# Altium PCB Optical Compressor V2.PcbDoc (part 1 of 2)
Units mm, origin at the board's own origin, x right, y up, seen from the top; angles counter-clockwise.
Board outline 47 x 95 mm, 4 copper layers (Top Copper, Ground Top, Ground Bottom, Bottom Copper), stack 1.706 mm thick; 141 components, 86 nets, 384 pads, 31 vias.
Unrouted connection lines stored in the file: 163.
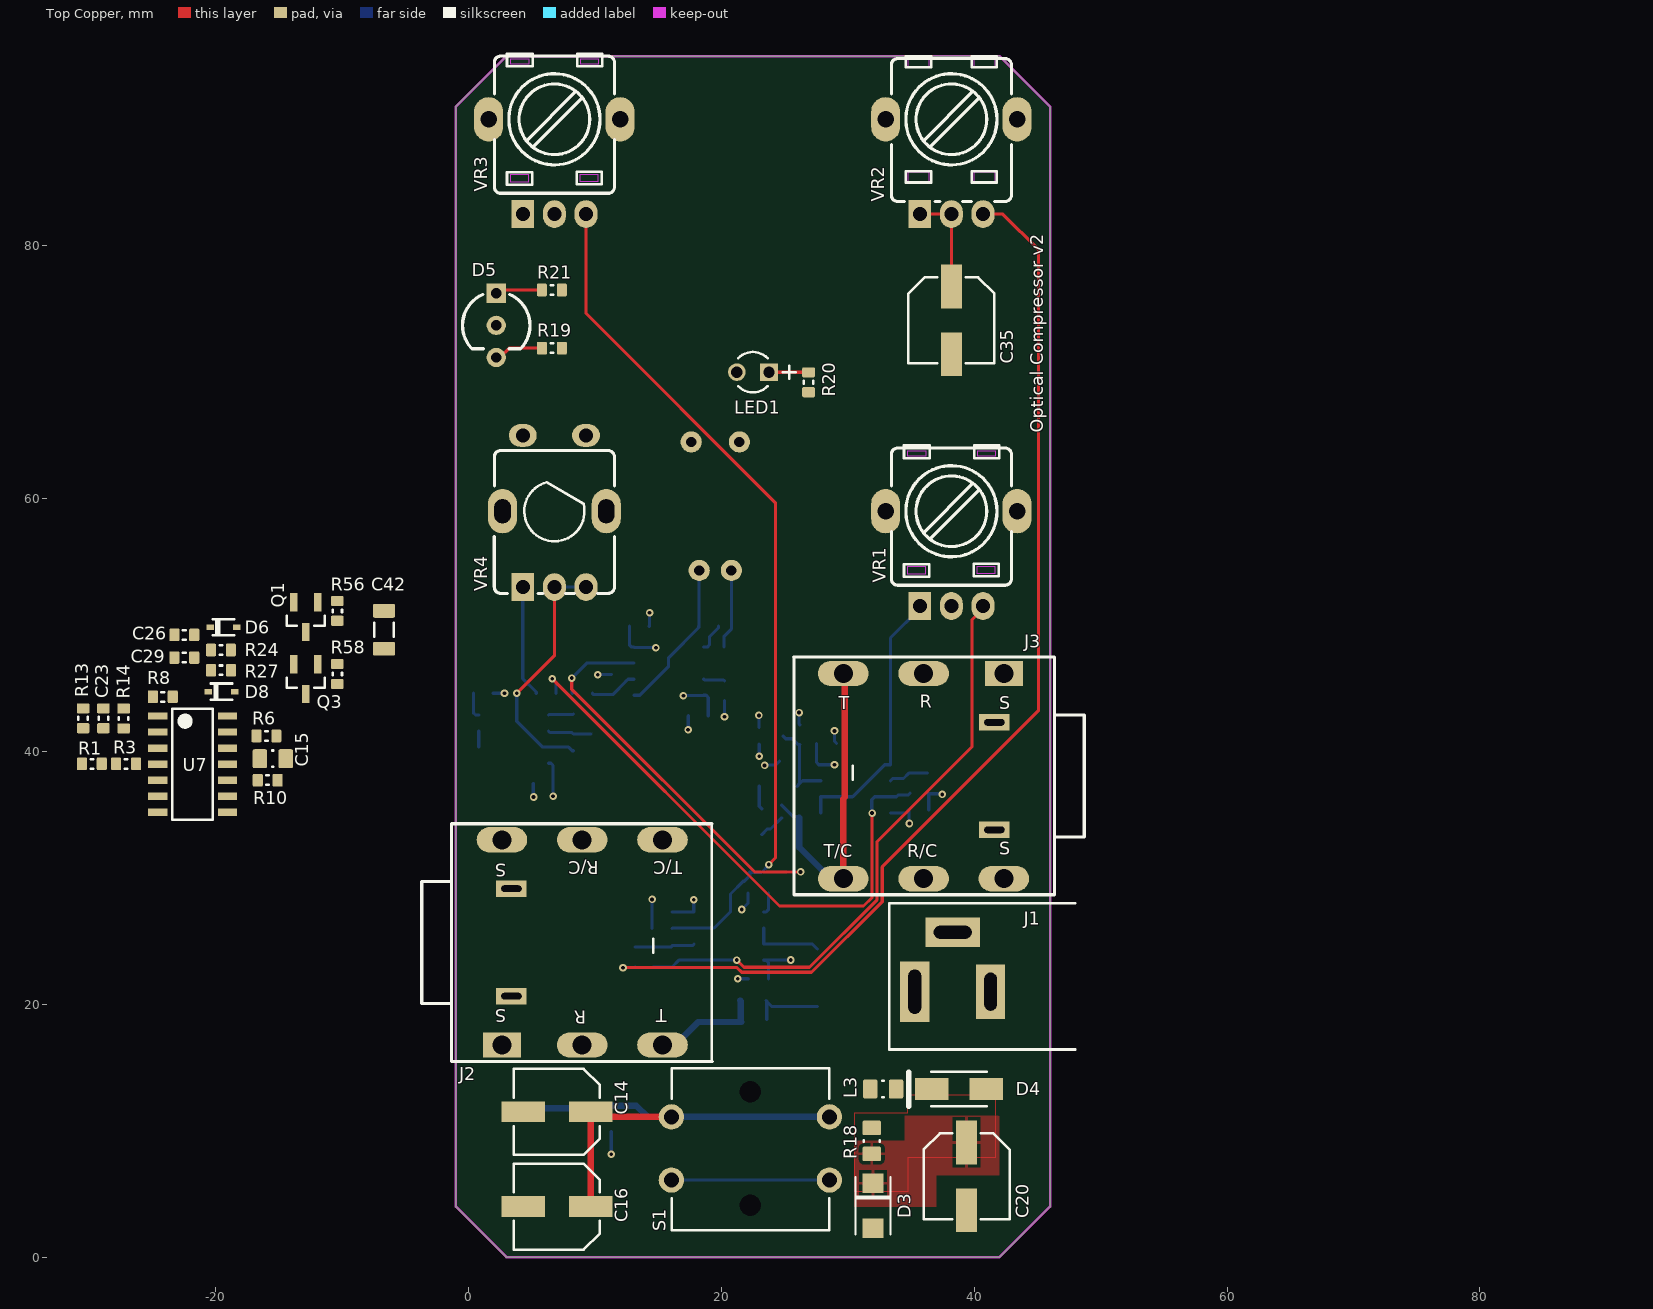
[diagram p0: Top Copper view]
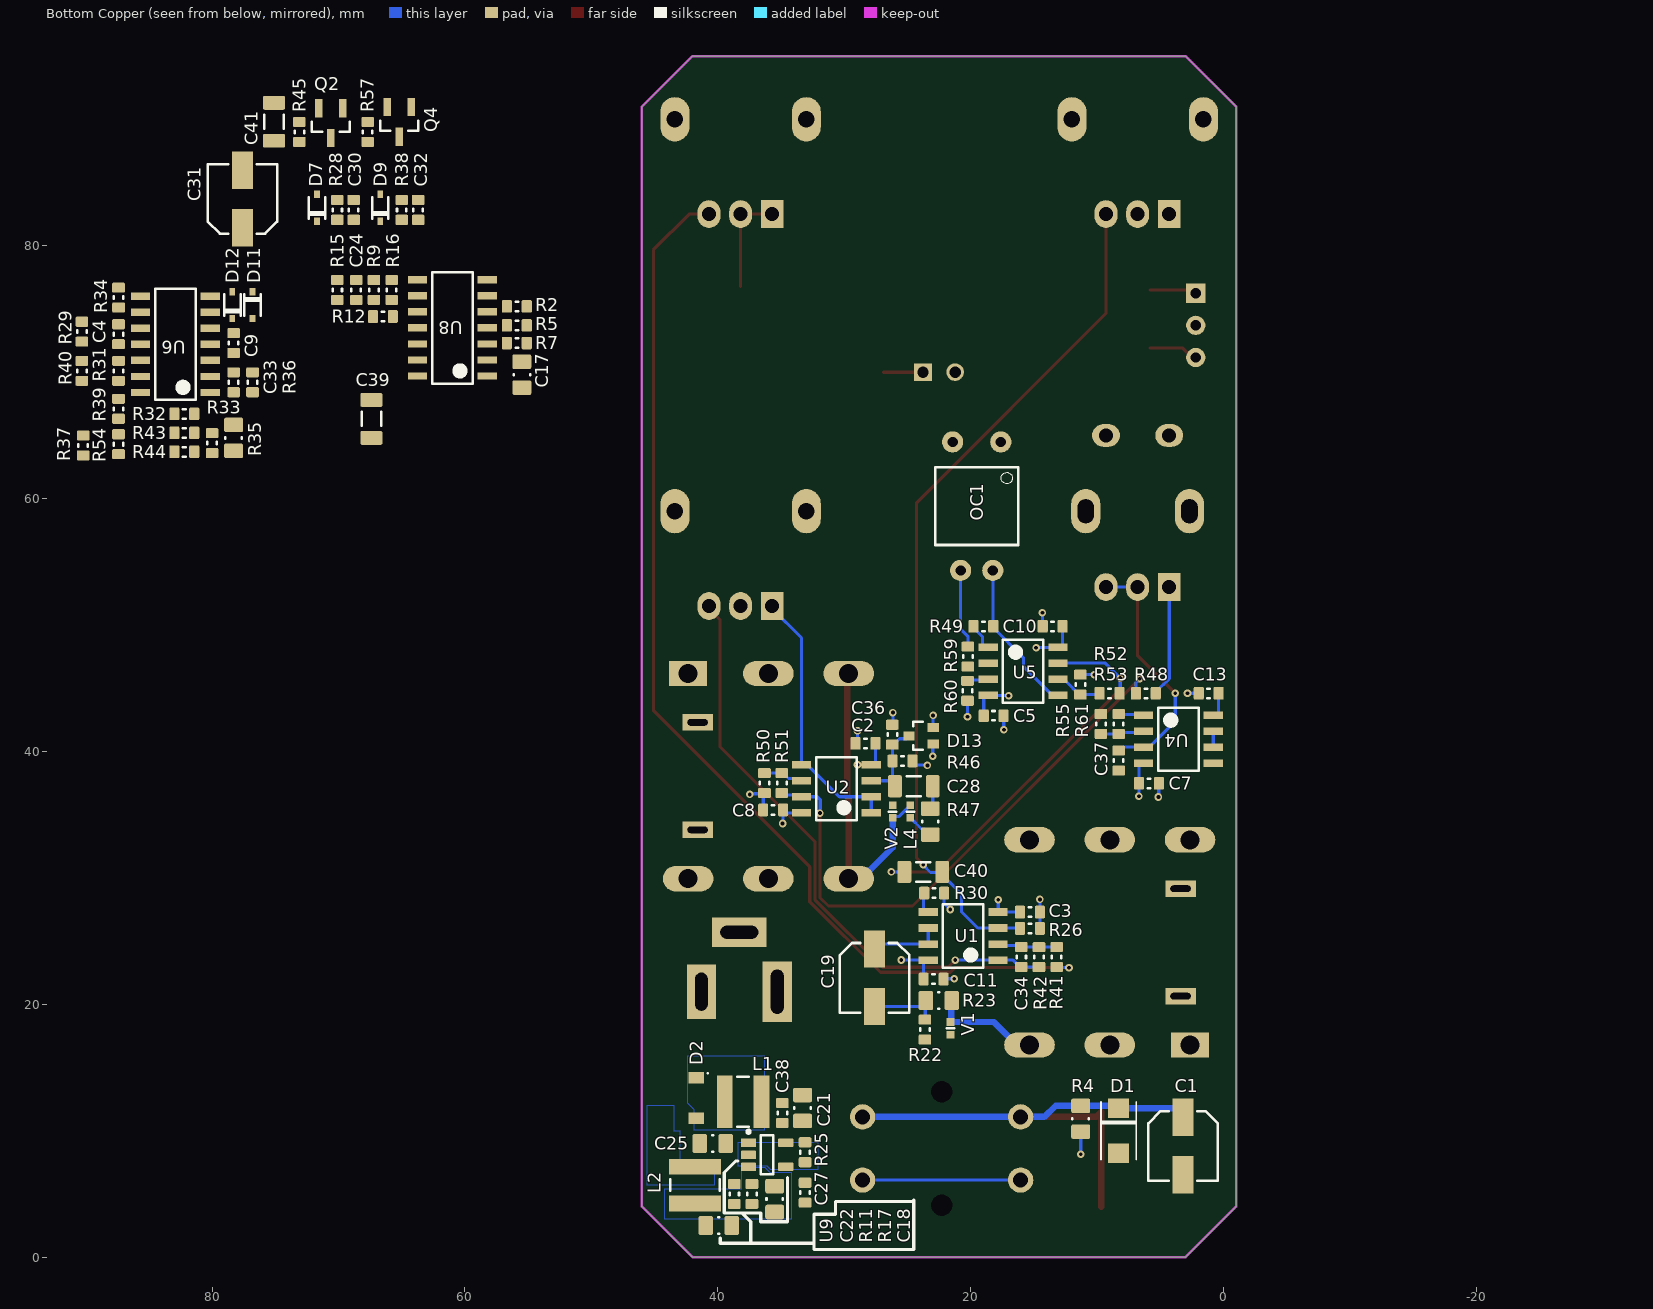
[diagram p1: Bottom Copper view, seen from below]
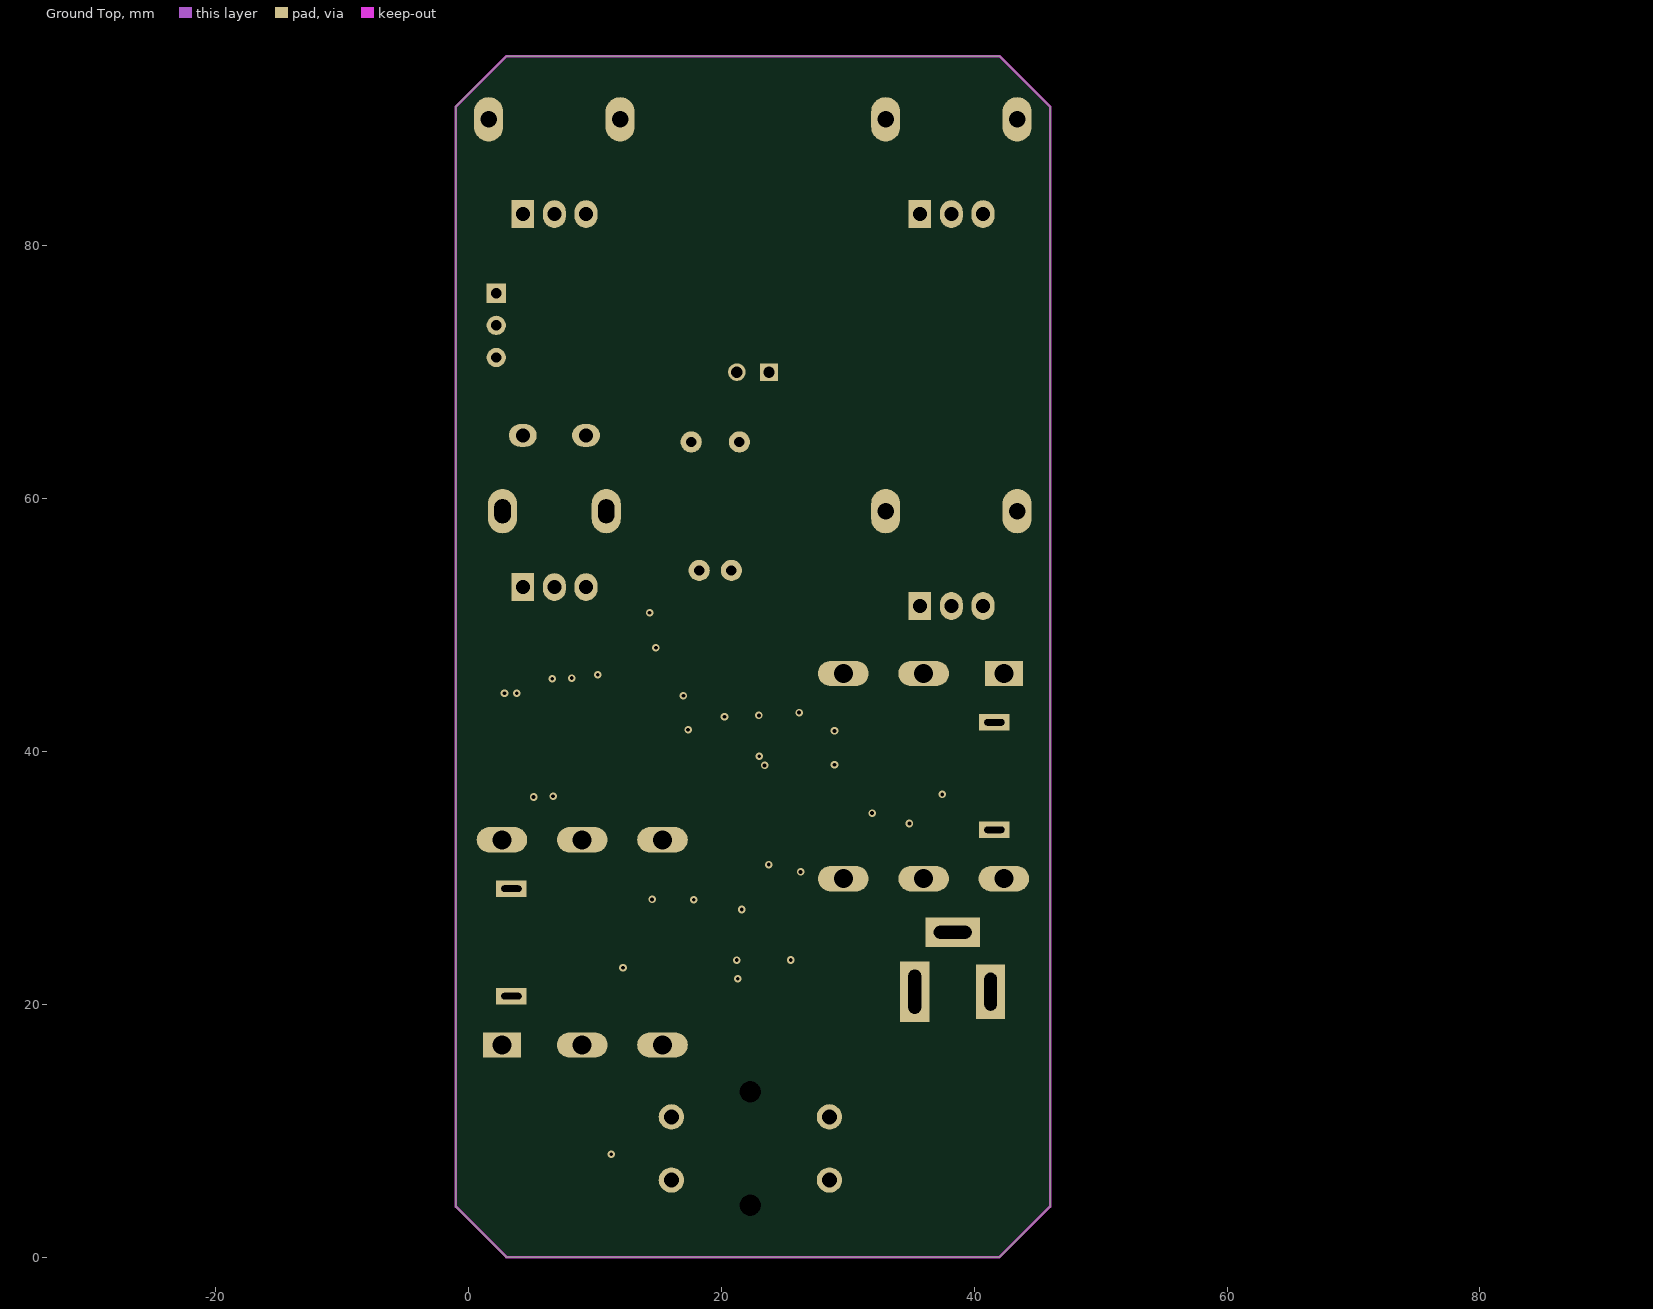
[diagram p2: Ground Top]
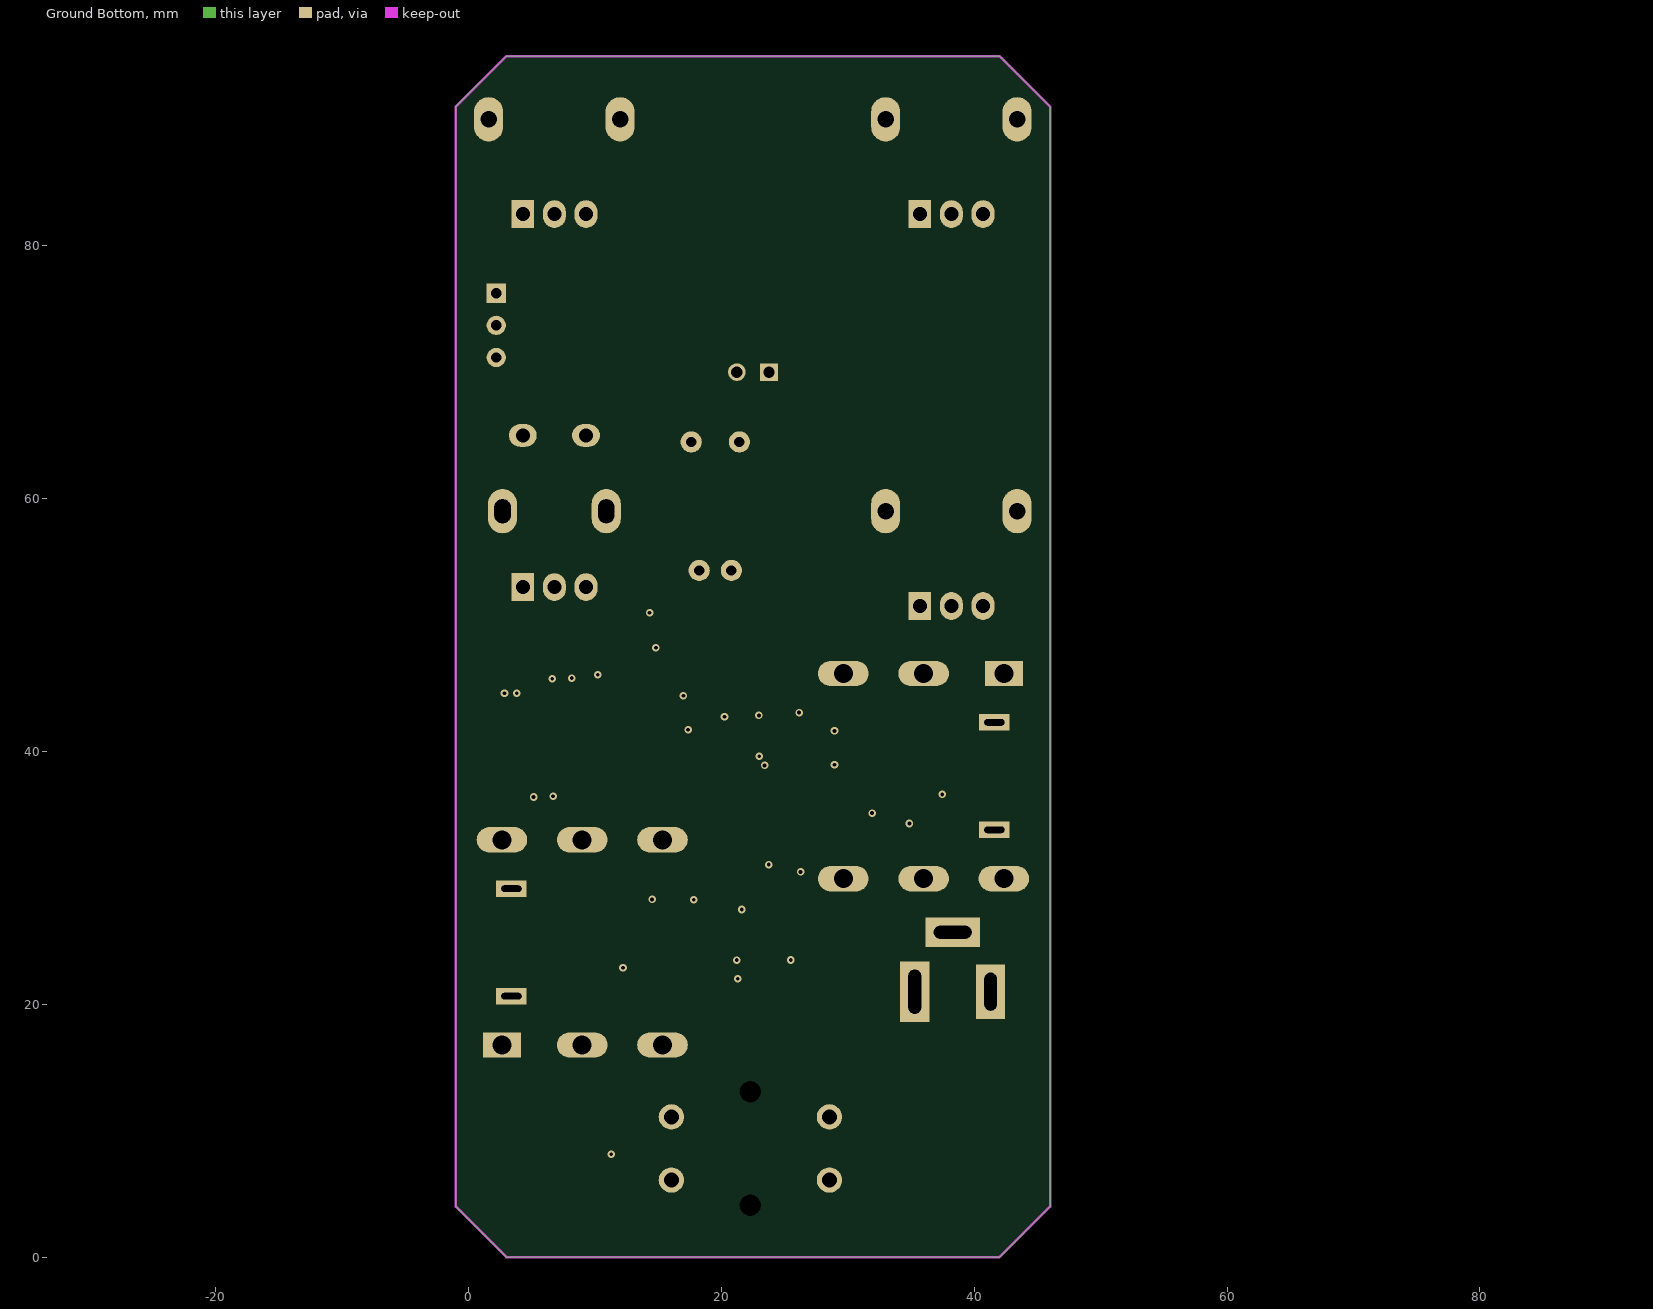
[diagram p3: Ground Bottom]

## Layer stack, top to bottom
Top Solder: solder mask 0.0203, JLC-001, Dk 3.8
Top Copper: signal copper 0.035
Dielectric 4: prepreg 0.2, JLC7628, Dk 4.6
Ground Top: signal copper 0.018
Dielectric 1: core 1.2, Core-009, Dk 3.9
Ground Bottom: signal copper 0.018
Dielectric 5: prepreg 0.2, JLC7628, Dk 4.6
Bottom Copper: signal copper 0.035
Bottom Solder: solder mask 0.0203, JLC-001, Dk 3.8

## Board outline
-1,91 -1,4 3,0 42,0 46,4 46,91 42,95 3,95

## Design rules (kind name [scope] priority, off if disabled: settings)
Clearance "Clearance Selective" [OnLayer('Multi-Layer') And IsPad And PadIsPlated vs OnLayer('Bottom Copper') And IsPad] p1: gap=0 ignorepadtopadclearanceinfootprint=FALSE except(3: SMDPad-THPad)
Clearance [All] p2: gap=0.15 ignorepadtopadclearanceinfootprint=TRUE
PlaneConnect [All] p1: pad.planeconnectstyle=Relief pad.reliefexpansion=0.5 pad.reliefentries=4 pad.reliefconductorwidth=0.25 pad.reliefairgap=0.25 via.planeconnectstyle=Direct via.reliefexpansion=0.5 via.reliefentries=4 via.reliefconductorwidth=0.25 via.reliefairgap=0.25
PolygonConnect PolygonConnect_LM2611 [All vs IsNamedPolygon('+9V_L01_P016') Or IsNamedPolygon('-9V_L04_P019') Or IsNamedPolygon('NONET_L04_P017') Or IsNamedPolygon('NONET_L04_P018') Or IsNamedPolygon('NONET_L04_P015') Or IsNamedPolygon('NONET_L01_P009') Or IsNamedPolygon('NONET_L04_P010')] p1: thpad.connectstyle=Relief thpad.reliefconductorwidth=0.254 thpad.reliefentries=4 thpad.polygonreliefangle="90 Angle" thpad.airgapwidth=0.254 smdpad.connectstyle=Direct smdpad.reliefconductorwidth=0.254 smdpad.reliefentries=4 smdpad.polygonreliefangle="90 Angle" smdpad.airgapwidth=0.254 via.connectstyle=Direct via.reliefconductorwidth=0.254 via.reliefentries=4 via.polygonreliefangle="90 Angle" via.airgapwidth=0.254
PolygonConnect [All] p2: thpad.connectstyle=Relief thpad.reliefconductorwidth=0.254 thpad.reliefentries=4 thpad.polygonreliefangle="90 Angle" thpad.airgapwidth=0.254 smdpad.connectstyle=Relief smdpad.reliefconductorwidth=0.254 smdpad.reliefentries=4 smdpad.polygonreliefangle="90 Angle" smdpad.airgapwidth=0.254 via.connectstyle=Direct via.reliefconductorwidth=0.254 via.reliefentries=4 via.polygonreliefangle="90 Angle" via.airgapwidth=0.254
RoutingVias [All] p1: holewidth=0.3 width=0.6 viastyle="Through Hole" minholewidth=0.3 minwidth=0.6 maxholewidth=0.3 maxwidth=0.6
SolderMaskExpansion [All] p1: expansion=0.102 istentingtop=FALSE
Width [All] p1: maxlimit=1 minlimit=0.25 preferedwidth=0.25
29 further rules are at their usual default settings.

## Components (designator, comment, footprint, x,y, rotation, side; value= is the part's Value field where it differs from the comment)
C1 "Cap pol 10µF 35V" "E-CAP, SMT, diameter 5mm, height 5.4mm" 3.2,8.8 r270 bottom
C2 "Cap 100nF 0603 X7R" 0603-CAP 28.325,40.638 r0 bottom
C3 "Cap 100nF 0603 X7R" 0603-CAP 15.313,27.3 r180 bottom
C4 "Cap 100nF 0603 X7R" 0603-CAP 87.4,73 r90 bottom
C5 "Cap 100nF 0603 X7R" 0603-CAP 18.183,42.825 r180 bottom
C7 "Cap 100nF 0603 X7R" 0603-CAP 5.9,37.475 r180 bottom
C8 "Cap 100nF 0603 X7R" 0603-CAP 35.625,35.375 r0 bottom
C9 "Cap 100nF 0603 X7R" 0603-CAP 78.3,72.3 r270 bottom
C10 "Cap 100nF 0603 X7R" 0603-CAP 13.517,49.9 r180 bottom
C11 "Cap 100nF 0603 X7R" 0603-CAP 22.933,22 r0 bottom
C13 "Cap 100nF 0603 X7R" 0603-CAP 1.175,44.6 r180 bottom
C14 "Cap pol 47µF 16V" "E-CAP, SMT, diameter 6.3mm, height 5.4mm" 7,11.5 r180 top
C15 "Cap 0805 2.2uF" 0805-CAP -15.475,39.425 r0 top value="2.2 uF"
C16 "Cap pol 47µF 16V" "E-CAP, SMT, diameter 6.3mm, height 5.4mm" 7,4 r180 top
C17 "Cap 0805 2.2uF" 0805-CAP 55.5,69.8 r270 bottom value="2.2 uF"
C18 "Cap 0805 22uF" 0805-CAP 39.925,2.5 r180 bottom value=22uF
C19 "Cap pol 10µF 35V" "E-CAP, SMT, diameter 5mm, height 5.4mm" 27.6,22.1 r270 bottom
C20 "Cap pol 220µF 16V" "E-CAP, SMT, diameter 6.3mm, height 7.7mm" 39.4,6.4 r270 top
C21 "Cap 0805 22uF" 0805-CAP 33.3,11.8 r270 bottom value=22uF
C22 "Cap 0603 330pF" 0603-CAP 38.7,5 r90 bottom value=330pF
C23 "Cap 100nF 0603 X7R" 0603-CAP -28.875,42.625 r90 top
C24 "Cap 100nF 0603 X7R" 0603-CAP 68.6,76.5 r270 bottom
C25 "Cap 1µF 0805 X7R" 0805-CAP 40.4,9 r0 bottom
C26 "Cap 100nF 0603 X7R" 0603-CAP -22.475,49.225 r180 top
C27 "Cap 100nF 0603 X7R" 0603-CAP 33.1,5.1 r270 bottom
C28 "Cap 100nF 1206 C0G" 1206-CAP 24.5,37.25 r0 bottom
C29 "Cap 100nF 0603 X7R" 0603-CAP -22.475,47.425 r0 top
C30 "Cap 100nF 0603 X7R" 0603-CAP 68.8,82.837 r270 bottom
C31 "Cap pol 10µF 35V" "E-CAP, SMT, diameter 5mm, height 5.4mm" 77.6,83.7 r90 bottom
C32 "Cap 100nF 0603 X7R" 0603-CAP 63.7,82.837 r90 bottom
C33 "Cap 10nF 0603 C0G" 0603-CAP 78.3,69.2 r270 bottom
C34 "Cap 0603 100pF" 0603-CAP 16,23.737 r270 bottom value=100pF
C35 "Cap pol 220µF 16V" "E-CAP, SMT, diameter 6.3mm, height 7.7mm" 38.2,74.1 r270 top
C36 "Cap 100pF 0603 C0G" 0603-CAP 26.2,41.325 r90 bottom
C37 "Cap 3.3nF 0603 C0G" 0603-CAP 8.3,39.275 r270 bottom
C38 "Cap 100nF 0603 X7R" 0603-CAP 34.9,11.4 r90 bottom
C39 "Cap 100nF 1206 C0G" 1206-CAP 67.4,66.3 r90 bottom
C40 "Cap 100nF 1206 C0G" 1206-CAP 23.75,30.475 r180 bottom
C41 "Cap 100nF 1206 C0G" 1206-CAP 75.1,89.8 r270 bottom
C42 "Cap 100nF 1206 C0G" 1206-CAP -6.675,49.625 r270 top
D1 "SML4742-E3/5A" DO-214AC 8.3,8.232 r90 bottom
D2 "MBR0520-TP" SODFL370X135-2N 41.7,12.6 r270 bottom
D3 "SML4742-E3/5A" DO-214AC 32,2.3 r90 top
D4 "SS14" SS14 38.8,13.3 r180 top
D5 "3pled" "LED DUAL REDBLUE" 2.2,73.7 r270 top locked
D6 "1N4148WS-7-F" 1N4148WS-7-F -19.375,49.825 r180 top
D7 "1N4148WS-7-F" 1N4148WS-7-F 71.7,83 r270 bottom
D8 "1N4148WS-7-F" 1N4148WS-7-F -19.52,44.725 r180 top
D9 "1N4148WS-7-F" 1N4148WS-7-F 66.7,83 r270 bottom
D11 "1N4148WS-7-F" 1N4148WS-7-F 76.8,75.3 r90 bottom
D12 "1N4148WS-7-F" 1N4148WS-7-F 78.4,75.3 r270 bottom
D13 "BAT54SWT1G" ONSC-SOT-323-3-419-04_V 23.925,41.236 r0 bottom
J1 "DC Jack TH" DC_Jack 38.674,20.873 r180 top locked
J2 "Neutrik TRS Jack with metal nut" "Neutrik Jack with Cliff EMI screen" 9,24.9 r180 top locked
J3 "Neutrik TRS Jack with metal nut" "Neutrik Jack with Cliff EMI screen" 36,38.05 r0 top locked
L1 "CR32NP-100KC" INDC3340X27N 38,12.3 r0 bottom
L2 "CR32NP-100KC" INDC3340X27N 41.8,5.7 r270 bottom
L3 "Ferrite BLM21SP102SN1" 0805-IND 32.8,13.3 r180 top
L4 "MAF1005GAD352A" "0402 COMPONENT" 24.775,35.25 r270 bottom
LED1 "LED 3mm RED" KING-WP710A10QBCD_V 22.5,70 r180 top locked
OC1 "NSL-32SR2S" NSL 19.525,59.4 r90 bottom
Q1 "MMBFJ201" MMBFJ201 -12.875,50.625 r270 top
Q2 "MMBFJ201" MMBFJ201 70.6,89.7 r270 bottom
Q3 "MMBFJ201" MMBFJ201 -12.875,45.725 r270 top
Q4 "MMBFJ201" MMBFJ201 65.2,89.8 r270 bottom
R1 "Res 20k 1% 0603" 0603-RES -29.788,39.025 r0 top
R2 "Res 20k 1% 0603" 0603-RES 55.9,75.2 r0 bottom
R3 "Res 10k 1% 0603" 0603-RES -27.075,39.025 r180 top
R4 "Res 10R 5% 0805" 0805-RES 11.3,10.95 r270 bottom
R5 "Res 10k 1% 0603" 0603-RES 55.9,73.7 r180 bottom
R6 "Res 10k 1% 0603" 0603-RES -15.975,41.225 r180 top
R7 "Res 10k 1% 0603" 0603-RES 55.9,72.3 r0 bottom
R8 "Res 10k 1% 0603" 0603-RES -24.175,44.325 r180 top
R9 "Res 10k 1% 0603" 0603-RES 67.2,76.5 r270 bottom
R10 "Res 10k 1% 0603" 0603-RES -15.875,37.725 r180 top
R11 "Res 4.7k 1% 0603" 0603-RES 37.3,5 r270 bottom
R12 "Res 10k 1% 0603" 0603-RES 66.487,74.4 r180 bottom
R13 "Res 100k 1% 0603" 0603-RES -30.475,42.625 r90 top
R14 "Res 10k 1% 0603" 0603-RES -27.275,42.612 r90 top
R15 "Res 100k 1% 0603" 0603-RES 70.1,76.5 r270 bottom
R16 "Res 10k 1% 0603" 0603-RES 65.8,76.5 r270 bottom
R17 "Res 29.4k 1% 0805" 0805-RES 35.5,4.6 r90 bottom
R18 "Res 10R 5% 0805" 0805-RES 31.9,9.2 r270 top
R19 "Res 10k 1% 0603" 0603-RES 6.6,71.9 r0 top
R20 "Res 10k 1% 0603" 0603-RES 26.9,69.2 r270 top
R21 "Res 10k 1% 0603" 0603-RES 6.6,76.5 r0 top
R22 "Res 100k 1% 0603" 0603-RES 23.62,18 r270 bottom
R23 "Res 100R 1% 0805" 0805-RES 22.52,20.3 r180 bottom
R24 "Res 1M 1% 0603" 0603-RES -19.575,48.025 r0 top
R25 "Res 100k 1% 0603" 0603-RES 33.1,8.3 r270 bottom
R26 "Res 1M 1% 0603" 0603-RES 15.313,26 r180 bottom
R27 "Res 1M 1% 0603" 0603-RES -19.575,46.425 r0 top
R28 "Res 1M 1% 0603" 0603-RES 70.1,82.837 r90 bottom
R29 "Res 6.81k 1% 0603" 0603-RES 90.3,73.2 r270 bottom
R30 "Res 1M 1% 0603" 0603-RES 22.887,28.8 r180 bottom
R31 "Res 2.2k 1% 0603" 0603-RES 87.4,70.1 r90 bottom
R32 "Res 10k 1% 0603" 0603-RES 82.2,66.7 r180 bottom
R33 "Res 10k 1% 0603" 0603-RES 80,64.387 r270 bottom
R34 "Res 20k 1% 0603" 0603-RES 87.4,75.9 r270 bottom
R35 "Res 200R 1% 0805" 0805-RES 78.3,64.8 r90 bottom
R36 "Res 6.81k 1% 0603" 0603-RES 76.8,69.2 r90 bottom
R37 "Res 10k 1% 0603" 0603-RES 90.2,64.2 r90 bottom
R38 "Res 1M 1% 0603" 0603-RES 65,82.837 r90 bottom
R39 "Res 10k 1% 0603" 0603-RES 87.4,67.1 r90 bottom
R40 "Res 20k 1% 0603" 0603-RES 90.3,70.1 r90 bottom
R41 "Res 3.3k 1% 0603" 0603-RES 13.2,23.737 r90 bottom
R42 "Res 10k 1% 0603" 0603-RES 14.6,23.737 r270 bottom
R43 "Res 10k 1% 0603" 0603-RES 82.2,65.2 r0 bottom
R44 "Res 10k 1% 0603" 0603-RES 82.2,63.7 r180 bottom
R45 "Res 100k 1% 0603" 0603-RES 73.1,89 r90 bottom
R46 "Res 1M 1% 0603" 0603-RES 25.388,39.25 r180 bottom
R47 "Res 100R 1% 0805" 0805-RES 23.2,34.45 r90 bottom
R48 "Res 4.7k 1% 0603" 0603-RES 6.15,44.6 r180 bottom
R49 "Res 47k 1% 0603" 0603-RES 19,49.9 r180 bottom
R50 "Res 10k 1% 0603" 0603-RES 36.312,37.5 r90 bottom
R51 "Res 6.81k 1% 0603" 0603-RES 34.938,37.5 r90 bottom
R52 "Res 10k 1% 0603" 0603-RES 11.325,45.287 r270 bottom
R53 "Res 20k 1% 0603" 0603-RES 9.013,44.6 r180 bottom
R54 "Res 20k 1% 0603" 0603-RES 87.4,64.3 r90 bottom
R55 "Res 10k 1% 0603" 0603-RES 9.7,42.175 r270 bottom
R56 "Res 100k 1% 0603" 0603-RES -10.375,51.125 r90 top
R57 "Res 100k 1% 0603" 0603-RES 67.7,89 r90 bottom
R58 "Res 100k 1% 0603" 0603-RES -10.375,46.125 r90 top
R59 "Res 2.2k 1% 0603" 0603-RES 20.225,47.5 r90 bottom
R60 "Res 1M 1% 0603" 0603-RES 20.25,44.8 r270 bottom
R61 "Res 4.7k 1% 0603" 0603-RES 8.3,42.175 r90 bottom
S1 "Tact footswitch, SPST" Tact-SKHCBEA010 22.3,8.6 r0 top locked
U1 "TL072CD" SOIC8-127P600X175-8N 20.6,25.4 r0 bottom
U2 "TL072CD" SOIC8-127P600X175-8N 30.625,37.05 r0 bottom
U4 "TL072CD" SOIC8-127P600X175-8N 3.575,40.975 r180 bottom
U5 "TL072CD" SOIC8-127P600X175-8N 15.85,46.35 r180 bottom
U6 "MC33179D" SOIC14-127P600X175-14N 82.9,72.2 r0 bottom
U7 "CD4013BME" SOIC14-127P600X175-14N -21.815,38.995 r0 top
U8 "CD4013BME" SOIC14-127P600X175-14N 61,73.5 r0 bottom
U9 "LM2611BMF/NOPB" DBV0005A_M 36.1,8.1 r180 bottom
V1 "Var AVRF101U6R8KT242" "0402 COMPONENT" 21.6,18.1 r90 bottom
V2 "Var AVRF101U6R8KT242" "0402 COMPONENT" 26.175,35.25 r270 bottom
VR1 "Pot100kA 9mm" "LJV 9mm pot"#1 38.2,59 r0 top locked value=100kA
VR2 "Pot100kC 9mm D-Shaft" "LJV 9mm pot"#2 38.2,90 r0 top locked value=100kC
VR3 "Pot100kA 9mm" "LJV 9mm pot"#1 6.8,90 r0 top locked value=100kA
VR4 "Pot100kB 9mm D-shaft with switch" "LJV 9mm pot with switch" 6.8,59 r0 top locked value=100kC

## Footprints (in the part's own frame and the unit in brackets; to place one, negate y for a bottom-side part, rotate by r counter-clockwise, add the part's x,y. Pads: shape width x height; smd on the part's side, far side on the other; paste and mask are expansions set on the pad)
1N4148WS-7-F [mm] "SOD-323, 2-Leads, Body 1.7x1.3mm"
  rect 0.59x0.45 smd: 1(-1.055,0) 2(1.055,0)
  silkscreen extent -0.85,-0.65 0.85,0.65, body extent -0.85,-0.65 0.85,0.65, height 1.2
"0402 COMPONENT" [mm] "Chip Capacitor, 2-Leads, Body 1,00x0,50mm, IPC Medium Density"
  rect 0.6x0.6 smd: 1(-0.5,0) 2(0.5,0)
  silkscreen extent 0,-0.3 0,0.3, body extent -0.6,-0.35 0.6,0.35, height 0.7
0603-CAP [mm] "Chip Capacitor, 2-Leads, Body 1.6x0.8mm, IPC Medium Density"
  rrect25% 0.8x1 smd: 1(-0.787,0) 2(0.787,0)
  silkscreen extent -0.1,-0.38 0.1,0.38, body extent -0.85,-0.45 0.85,0.45, height 0.9
0603-RES [mm] "Chip resistor, 2-Leads, Body 1.6x0.8mm, IPC Medium Density"
  rrect25% 0.8x1 smd: 1(-0.787,0) 2(0.787,0)
  silkscreen extent -0.1,-0.38 0.1,0.38, body extent -0.85,-0.45 0.85,0.45, height 0.55
0805-CAP [mm] "Chip Capacitor, 2-Leads, Body 2.00x1.25mm, IPC Low Density"
  rrect25% 1.15x1.5 smd: 1(-1.025,0) 2(1.025,0)
  silkscreen extent -0.05,-0.65 0.05,0.65, body extent -1.05,-0.67 1.05,0.68, height 1.35
0805-IND [mm] "Chip Inductor, 2-Leads, Body 2.00x1.25mm, IPC Low Density"
  rrect25% 1.15x1.5 smd: 1(-1.025,0) 2(1.025,0)
  silkscreen extent -0.05,-0.65 0.05,0.65, body extent -1.1,-0.72 1.1,0.73, height 1.45
0805-RES [mm] "Chip Resistor, 2-Leads, Body 2.00x1.25mm, IPC Low Density"
  rrect25% 1.15x1.5 smd: 1(-1.025,0) 2(1.025,0)
  silkscreen extent -0.05,-0.65 0.05,0.65, body extent -1.05,-0.67 1.05,0.68, height 0.6
1206-CAP [mm] "Chip Capacitor, 2-Leads, Body 3,20x1,60mm, IPC Medium Density"
  rrect25% 1.1x1.75 smd: 1(-1.5,0) 2(1.5,0)
  silkscreen extent -0.55,-0.77 0.55,0.77, body extent -1.7,-0.9 1.7,0.9, height 1.8
DBV0005A_M [mm] "SOT23, 5-Leads, Body 3.05x1.75mm, Pitch 0.95mm, IPC Low Density"
  rrect15% 1.2x0.65 smd: 1(-1.475,0.95) 2(-1.475,0) 3(-1.475,-0.95) 4(1.475,-0.95) 5(1.475,0.95)
  silkscreen extent -1.6,-1.55 0.5,1.95, body extent -1.42,-1.46 1.42,1.46, height 1.08
DC_Jack [mm]
  rect 2.3x4.8 hole 1 slot 3.5 at 90 deg: 1(3.374,-0.127)
  rect 2.3x4.3 hole 1 slot 3 at 90 deg: 2(-2.626,-0.127)
  rect 4.3x2.3 hole 1 slot 3 at 0 deg: 3(0.374,-4.827)
  silkscreen extent -9.33,-7.11 5.41,4.44, body extent -10.3,-5.01 4.1,4.39, height 11
DO-214AC [mil]
  rect 60x66 smd: 1(0,0) 2(140,0)
  silkscreen extent -20,-55 160,55
"E-CAP, SMT, diameter 5mm, height 5.4mm" [mm] "Aluminum Electrolytic Capacitor, Body 5,30x5,30x5,65mm, IPC Medium Density"
  rect 2.95x1.65 smd: 1(-2.275,0) 2(2.275,0)
  silkscreen extent -2.75,-2.75 2.75,2.75, body extent -3.1,-2.75 3.1,2.75, height 5.65
"E-CAP, SMT, diameter 6.3mm, height 5.4mm" [mm] "Aluminum Electrolytic Capacitor, Body 6,60x6,60x5,65mm, IPC Medium Density"
  rect 3.45x1.65 smd: 1(-2.675,0) 2(2.675,0)
  silkscreen extent -3.4,-3.4 3.4,3.4, body extent -3.4,-3.4 3.4,3.4, height 5.65
"E-CAP, SMT, diameter 6.3mm, height 7.7mm" [mm] "Aluminum Electrolytic Capacitor, Body 6,60x6,60x8,00mm, IPC Medium Density"
  rect 3.45x1.65 smd: 1(-2.675,0) 2(2.675,0)
  silkscreen extent -3.4,-3.4 3.4,3.4, body extent -3.4,-3.4 3.4,3.4, height 8
INDC3340X27N [mm] "Chip Inductor, 2-Leads, Body 3.30x4.00mm, IPC Medium Density"
  rect 1.25x4.14 smd: 1(-1.455,0) 2(1.455,0)
  silkscreen extent -0.45,-1.97 0.45,1.97, body extent -1.65,-2 1.65,2, height 2.7
KING-WP710A10QBCD_V [mm] "THD, 2-Leads, Dia 3.2mm"
  rect 1.4x1.4 hole 0.889 paste-0.025: 1(-1.27,0)
  round 1.4 hole 0.889 paste-0.025: 2(1.27,0)
  silkscreen extent -3.39,-1.6 1.16,1.6, body extent -1.62,-1.6 1.62,1.6, height 14.1
"LED DUAL REDBLUE" [mil] "M900 / M500 led 3-pin"
  rect 60x60 hole 32: 1(-100,0)
  round 60 hole 32: 2(0,0) 3(100,0)
  silkscreen extent -96,-105 73,105, body extent -110,-78 110,78, height 603
"LJV 9mm pot"#1 [mm]
  rect 1.8x2.2 hole 1.1: 1(-2.5,-7.5)
  oval 1.8x2.2 hole 1.1: 2(0,-7.5) 3(2.5,-7.5)
  oval 2.3x3.5 hole 1.3: 4(-5.2,0) 5(5.2,0)
  Top Copper keep-out region: -2.025,-4.4 -3.475,-4.4 -3.475,-4.953 -2.025,-4.953
  Top Copper keep-out region: 3.475,-4.375 2,-4.375 2,-4.9 3.475,-4.9
  Top Copper keep-out region: 3.525,4.75 2.025,4.75 2.025,4.4 3.525,4.4
  Top Copper keep-out region: -2,4.75 -3.5,4.75 -3.5,4.4 -2,4.4
  silkscreen extent -4.75,-5.85 4.75,5.2, body extent -6.05,-7.8 6.05,4.8, height 23
"LJV 9mm pot"#2 [mm]
  rect 1.8x2.2 hole 1.1: 1(-2.5,-7.5)
  oval 1.8x2.2 hole 1.1: 2(0,-7.5) 3(2.5,-7.5)
  oval 2.3x3.5 hole 1.3: 4(-5.2,0) 5(5.2,0)
  Top Copper keep-out region: 1.751,4.2 3.451,4.2 3.451,4.9 1.751,4.9
  Top Copper keep-out region: -1.75,-4.199 -3.45,-4.199 -3.45,-4.899 -1.75,-4.899
  Top Copper keep-out region: 1.751,-4.899 3.451,-4.899 3.451,-4.199 1.751,-4.199
  Top Copper keep-out region: -1.75,4.9 -3.45,4.9 -3.45,4.2 -1.75,4.2
  silkscreen extent -4.75,-6.5 4.75,5, body extent -6.05,-7.8 6.05,4.8, height 23
"LJV 9mm pot with switch" [mm]
  rect 1.8x2.2 hole 1.1: 1(-2.5,-6)
  oval 1.8x2.2 hole 1.1: 2(0,-6) 3(2.5,-6)
  oval 2.3x3.5 hole 1.3 slot 1.9 at 90 deg: 4(-4.1,0) 5(4.1,0)
  oval 2.2x1.8 hole 1.1: 6(-2.5,6) 7(2.5,6)
  silkscreen extent -4.75,-6.5 4.75,4.8, body extent -6.05,-7.8 6.05,4.8, height 23
MMBFJ201 [mm] "SOT23, 3-Leads, Body 2.9x1.3mm, Pitch 0.95mm, Lead Span 2.5mm, IPC Low Density"
  rect 1.45x0.6 smd: 1(-1.175,0.95) 2(-1.175,-0.95) 3(1.175,0)
  silkscreen extent -0.1,-1.5 0.7,1.5, body extent -1.25,-1.5 1.25,1.5, height 1.1
"Neutrik Jack with Cliff EMI screen" [mm] "EMI Screen partno FCR14422"
  rect 3x2 hole 1.5: 1(6.35,8.115)
  oval 4x2 hole 1.5: 2(0,8.115) 3(-6.35,8.115) 4(-6.35,-8.115) 5(0,-8.115) 6(6.35,-8.115)
  rect 2.4x1.3 hole 0.5 slot 1.6 at 0 deg: 7(5.6,4.25) 8(5.6,-4.25)
  silkscreen extent -10.3,-9.39 12.7,9.43, body extent -13.2,-9.1 18.6,9.1, height 15.93
NSL [mil]
  round 66 hole 32: A(200,75) C1(-200,-50) C2(-200,50) K(200,-75)
  silkscreen extent -121,-130 121,130
ONSC-SOT-323-3-419-04_V [mm] "SOT23, 3-Leads, Body 2x1.25mm, Pitch 0.65mm"
  rect 0.9x0.7 smd: 1(-0.95,0.65) 2(-0.95,-0.65) 3(0.95,0)
  silkscreen extent -0.11,-1.1 0.63,1.1, body extent -0.63,-1 0.63,1, height 1
SODFL370X135-2N [mm] "SODFL, 2-Leads, Body 1.60x3.70mm, IPC Medium Density"
  rect 0.91x1.22 smd: 1(1.6,0) 2(-1.6,0)
  silkscreen extent -2,0.86 -1.91,0.96, body extent -1.42,-0.9 1.43,0.9, height 1.35
SOIC8-127P600X175-8N [mm] "SOIC, 8-Leads, Body 4,90x3,90mm, Pitch 1,27mm, IPC Medium Density"
  rect 1.52x0.6 smd: 1(-2.76,1.905) 2(-2.76,0.635) 3(-2.76,-0.635) 4(-2.76,-1.905) 5(2.76,-1.905) 6(2.76,-0.635) 7(2.76,0.635) 8(2.76,1.905)
  silkscreen extent -1.6,-2.5 1.6,2.5, body extent -3,-2.5 3,2.5, height 1.75
SOIC14-127P600X175-14N [mm] "SOIC, 14-Leads, Body 8,65x3,90mm, Pitch 1,27mm, IPC Medium Density"
  rect 1.52x0.58 smd: 1(-2.76,3.81) 2(-2.76,2.54) 3(-2.76,1.27) 4(-2.76,0) 5(-2.76,-1.27) 6(-2.76,-2.54) 7(-2.76,-3.81) 8(2.76,-3.81) 9(2.76,-2.54) 10(2.76,-1.27) 11(2.76,0) 12(2.76,1.27) 13(2.76,2.54) 14(2.76,3.81)
  silkscreen extent -1.6,-4.4 1.6,4.4, body extent -3,-4.4 3,4.4, height 1.75
SS14 [mm] "DO-214, 2-Leads, Body 4.375x2.725mm"
  rect 2.65x1.75 smd: A(-2.15,0) K(2.15,0)
  silkscreen extent -2.19,-1.36 3.98,1.36, body extent -2.19,-1.36 2.19,1.36, height 2.5
Tact-SKHCBEA010 [mm] "SKHCBEA010"
  round 2 hole 1.2: 1(-6.25,2.5) 2(6.25,2.5) 3(-6.25,-2.5) 4(6.25,-2.5)
  round 0 hole 1.7 unplated: ""(0,-4.5) ""(0,4.5)
  silkscreen extent -6.22,-6.48 6.22,6.35, body extent -7,-6 7,6, height 4.3

## Part data
C1 C19 C31: library part CMP-00115-4, "Cap Aluminum 10uF 35V ±20% (5x5.4mm) SMD 2000h 85°C", + Tolerance=20%, Capacitance=10µF, Lifetime @ Max. Temp. (hours)=2000h, Maximum operating temperature=85°C, Rated Voltage=35V, - Tolerance=20%
C2 C3 C4 C5 C7 C8 C9 C10 C11 C13 C23 C24 C26 C27 C29 C30 C32 C38: library part CMP-04109-3, "Cap 100nF 0603 X7R 50V +-10%", Capacitance=100nF, Dielectric=X7R, Maximum operating temperature=125°C, Rated Voltage=50V, Tolerance (+-)=10%, Height=900µm, Size (Imperial)=0603
C14 C16: library part CMP-00096-4, "Cap Aluminum 47uF 16V ±20% (6.3x5.4mm) SMD 2000h 85°C", + Tolerance=20%, Capacitance=47µF, Lifetime @ Max. Temp. (hours)=2000h, Maximum operating temperature=85°C, Rated Voltage=16V, - Tolerance=20%
C15 C17: library part CMP-019-0081-11, "2.2uF, 25V, X5R, 20%", Capacitance=2.2uF, Case Code (Imperial)=0805, Case Code (Metric)=2012, Dielectric=X5R, Dielectric Material=Ceramic, Max Operating Temperature=85°C, Min Operating Temperature=-55°C, Package Quantity=2000, Tolerance=20%, Voltage Rating=25V, Case/Package=0805, ComponentLink1Description=http://www.mouser.com/ds/2/427/vjw1bcbascomseries-223529.pdf?src-supplier=Mouser, ComponentLink1URL=http://www.mouser.com/ds/2/427/vjw1bcbascomseries-223529.pdf?src-supplier=Mouser, ComponentLink2Description=http://www.vishay.com/docs/28548/vjw1bcbascomseries.pdf?src-supplier=Avnet, ComponentLink2URL=http://www.vishay.com/docs/28548/vjw1bcbascomseries.pdf?src-supplier=Avnet, ComponentLink3Description=https://datasheet.ciiva.com/24219/c2012x5r1e225m125ac-265004-24219065.pdf?src-supplier=Mouser, ComponentLink3URL=https://datasheet.ciiva.com/24219/c2012x5r1e225m125ac-265004-24219065.pdf?src-supplier=Mouser, ComponentLink4Description=https://datasheet.ciiva.com/14911/c-series-generalappl-b11-14911750.pdf?src-supplier=Digi-Key, ComponentLink4URL=https://datasheet.ciiva.com/14911/c-series-generalappl-b11-14911750.pdf?src-supplier=Digi-Key, ComponentLink5Description=https://datasheet.ciiva.com/14911/c-series-generalappl-b11-14911751.pdf?src-supplier=Digi-Key, ComponentLink5URL=https://datasheet.ciiva.com/14911/c-series-generalappl-b11-14911751.pdf?src-supplier=Digi-Key, ComponentLink6Description=https://datasheet.ciiva.com/14911/c-series-generalappl-b11-14911752.pdf?src-supplier=Digi-Key, ComponentLink6URL=https://datasheet.ciiva.com/14911/c-series-generalappl-b11-14911752.pdf?src-supplier=Digi-Key, Composition=Ceramic, Design Item ID="Cap 0805 2.2uF", Height=1.25mm, Lead Free="Lead Free", Length=2mm, Mount="Surface Mount", Number of Pins=2, Packaging="Tape and Reel", Pricing 1="1 = 0,27000, 10 = 0,11500, 50 = 0,11500, 100 = 0,07900, 1000 = 0,05900, 10000 = 0,04200 (USD)", REACH SVHC=Unknown, RoHS=Yes, Source=main.SchLib, Stock 1=3928, Termination=SMD/SMT, Thickness=0.057inch, Voltage Rating (DC)=25V, Weight=0.000194oz, Width=0.049inch
C18 C21: library part CMP-019-0032-4, "22uF, 16V, X5R, 20%", Capacitance=22uF, Case Code (Imperial)=0805, Case Code (Metric)=2012, Dielectric=X5R, Dielectric Material=Ceramic, Max Operating Temperature=85°C, Min Operating Temperature=-55°C, Package Quantity=3000, Tolerance=20%, Voltage=16V, Case/Package=0805, Depth=1.25mm, Design Item ID="Cap 0805 22uF", Dissipation Factor=0.035%, Height=0.85mm, LatestRevisionDate=29-May-2009, LatestRevisionNote="IPC-7351 Footprint Added.", Lead Free="Lead Free", Length=2mm, Mount="Surface Mount", PackageDescription="Chip Capacitor", PackageReference=C1206, Packaging="Tape and Reel", Pricing 1="1 = 0,49000, 10 = 0,34000, 50 = 0,34000, 100 = 0,22400, 1000 = 0,14100, 10000 = 0,11200 (USD)", Published=8-Jun-2000, Publisher="Altium Limited", REACH SVHC="No SVHC", RoHS=Yes, Source=main.SchLib, Stock 1=446787, Termination=SMD/SMT, Thickness=0.039inch, Voltage Rating=16V, Voltage Rating (DC)=16V, Weight=0.000335oz, Width=0.049inch
C20 C35: library part CMP-00098-4, "Cap Aluminum 220uF 16V ±20% (6.3x7.7mm) SMD 2000h 85°C", + Tolerance=20%, Capacitance=220µF, Lifetime @ Max. Temp. (hours)=2000h, Maximum operating temperature=85°C, Rated Voltage=16V, - Tolerance=20%
C22: library part CMP-019-0066-14, "330pF,  5%,  50V,  C0G", Capacitance=330pF, Case Code (Imperial)=0603, Case Code (Metric)=1608, Dielectric=C0G, Dielectric Material=Ceramic, Max Operating Temperature=125°C, Min Operating Temperature=-55°C, Package Quantity=1, Temperature Coefficient=30ppm/°C, Tolerance=5%, Voltage=50V, Case/Package=0603, ComponentLink1Description=https://datasheet.ciiva.com/144/docfinderpartnumber-c0603c331j5gactu-144424.pdf?src-supplier=Digi-Key, ComponentLink1URL=https://datasheet.ciiva.com/144/docfinderpartnumber-c0603c331j5gactu-144424.pdf?src-supplier=Digi-Key, ComponentLink2Description=https://datasheet.ciiva.com/14589/70095383-14589452.pdf?src-supplier=Allied+Electronics, ComponentLink2URL=https://datasheet.ciiva.com/14589/70095383-14589452.pdf?src-supplier=Allied+Electronics, ComponentLink3Description=https://datasheet.ciiva.com/7823/kem-c1003-c0g-smd-7823741.pdf?src-supplier=Element14, ComponentLink3URL=https://datasheet.ciiva.com/7823/kem-c1003-c0g-smd-7823741.pdf?src-supplier=Element14, ComponentLink4Description=https://datasheet.ciiva.com/7823/kem-c1003-c0g-smd-7823742.pdf?src-supplier=Element14, ComponentLink4URL=https://datasheet.ciiva.com/7823/kem-c1003-c0g-smd-7823742.pdf?src-supplier=Element14, ComponentLink5Description=https://datasheet.ciiva.com/14597/70095383-14597551.pdf?src-supplier=Allied+Electronics, ComponentLink5URL=https://datasheet.ciiva.com/14597/70095383-14597551.pdf?src-supplier=Allied+Electronics, Contact Material=Tin, Contact Plating=Tin,Matte, Depth=0.8mm, Design Item ID="Cap 0603 330pF", Dissipation Factor=0.5%, Height=0.8mm, Lead Free="Lead Free", Lead Pitch=0.7mm, Length=1.6mm, Mount="Surface Mount,PCB", Number of Pins=2, Packaging="Tape and Reel", Pricing 1="1=0,100000, 10=0,039000, 100=0,027000, 500=0,020000, 1000=0,016000, 4000=0,011000 (USD)", Radiation Hardening=No, REACH SVHC="No SVHC", RoHS=Yes, Source=main.SchLib, Stock 1=158995, Termination=SMD/SMT, Thickness=0.034inch, Voltage Rating=50V, Voltage Rating (DC)=50V, Width=0.8mm
C25: library part CMP-04113-3, "Cap 1µF 0805 X7R 50V +-10%", Capacitance=1µF, Dielectric=X7R, Maximum operating temperature=125°C, Rated Voltage=50V, Tolerance (+-)=10%, Height=1.45mm, Size (Imperial)=0805
C28 C39 C40 C41 C42: library part CMP-04102-2, "Cap 100nF 1206 C0G 50V +-5%", Capacitance=100nF, Dielectric=C0G, Maximum operating temperature=125°C, Rated Voltage=50V, Tolerance (+-)=5%, Height=1.8mm, Size (Imperial)=1206
C33: library part CMP-04095-2, "Cap 10nF 0603 C0G 50V +-5%", Capacitance=10nF, Dielectric=C0G, Maximum operating temperature=125°C, Rated Voltage=50V, Tolerance (+-)=5%, Height=900µm, Size (Imperial)=0603
C34: library part CMP-019-0054-13, "100pF, 50V, COG,  5%", Capacitance=100pF, Case Code (Imperial)=0603, Case Code (Metric)=1608, Dielectric=C0G, Max Operating Temperature=125°C, Min Operating Temperature=-55°C, Tolerance=5%, Voltage Rating=50V, Case/Package=0603, Design Item ID="Cap 0603 100pF", LatestRevisionDate=29-May-2009, LatestRevisionNote="IPC-7351 Footprint Added.", Length=0.063inch, Mount="Surface Mount", PackageDescription="Chip Capacitor", PackageReference=C1206, Packaging="Cut Tape", Pricing 1="1 = 0,10000, 10 = 0,02400, 50 = 0,02400, 100 = 0,02200, 1000 = 0,01900, 10000 = 0,01100 (USD)", Published=8-Jun-2000, Publisher="Altium Limited", REACH SVHC=Unknown, RoHS=Yes, Source=main.SchLib, Stock 1=12395, Thickness=0.034inch, Voltage Rating (DC)=50V, Width=0.031inch
C36: library part CMP-04086-1, "Cap 100pF 0603 C0G 50V +-5%", Capacitance=100pF, Dielectric=C0G, Maximum operating temperature=125°C, Rated Voltage=50V, Tolerance (+-)=5%, Height=900µm, Size (Imperial)=0603
C37: library part CMP-04092-2, "Cap 3.3nF 0603 C0G 50V +-5%", Capacitance=3.3nF, Dielectric=C0G, Maximum operating temperature=125°C, Rated Voltage=50V, Tolerance (+-)=5%, Height=900µm, Size (Imperial)=0603
D1 D3: library part CMP-029-0015-3, "12V Zener", Case/Package=SMA, Manufacturer="Vishay Semiconductors", Max Operating Temperature=150°C, Max Power Dissipation=1W, Max Reverse Leakage Current=5uA, Min Operating Temperature=-65°C, Package Quantity=7500, Tolerance=10%, Zener Voltage=12V, ComponentLink1Description=https://media.digikey.com/pdf/Data%20Sheets/Vishay%20Siliconix%20PDFs/SML4728-SML4764A.pdf?src-supplier=Digi-Key, ComponentLink1URL=https://media.digikey.com/pdf/Data%20Sheets/Vishay%20Siliconix%20PDFs/SML4728-SML4764A.pdf?src-supplier=Digi-Key, ComponentLink2Description=http://www.mouser.com/ds/2/427/sml4728-67952.pdf?src-supplier=Mouser, ComponentLink2URL=http://www.mouser.com/ds/2/427/sml4728-67952.pdf?src-supplier=Mouser, ComponentLink3Description=http://www.vishay.com/docs/85782/sml4728.pdf?src-supplier=Avnet, ComponentLink3URL=http://www.vishay.com/docs/85782/sml4728.pdf?src-supplier=Avnet, Design Item ID=SML4742-E3/5A, Element Configuration=Single, Impedance=9R, Manufacturer Part Number=SML4742-E3/5A, Mount="Surface Mount", Mouser part=78-SML4742-E3/5A, Number of Pins=2, Packaging="Tape and Reel", Power Dissipation=1W, Pricing 1="1 = 0,50000, 10 = 0,42600, 25 = 0,39760, 100 = 0,31800, 250 = 0,29524, 500 = 0,24982, 1000 = 0,19305, 2500 = 0,17602 (USD)", Radiation Hardening=No, RoHS=Yes, Source=main.SchLib, Stock 1=7485, Voltage Tolerance=10%
D2: library part CMP-055-0006-A.3, "Rectifier Diode, Schottky, 1 Phase, 1 Element, 0.5A, 20V V(RRM), Silicon"
D4: library part CMP-029-0000-5, "ON SEMICONDUCTOR - SS14 - DIODE, SCHOTTKY, 1A, 40V, DO-214AC-2", Average Rectified Current=1A, Case/Package=SMA, Forward Voltage=500mV, Manufacturer="ON Semiconductor / Fairchild", Max Forward Surge Current (Ifsm)=40A, Max Operating Temperature=125°C, Max Power Dissipation=1.1W, Max Repetitive Reverse Voltage (Vrrm)=40V, Min Operating Temperature=-65°C, Package Quantity=7500, Peak Reverse Current=200uA, ComponentLink1Description=https://datasheet.ciiva.com/4713/ss14-197224-4713938.pdf?src-supplier=Mouser, ComponentLink1URL=https://datasheet.ciiva.com/4713/ss14-197224-4713938.pdf?src-supplier=Mouser, ComponentLink2Description=https://datasheet.ciiva.com/8303/ss19-8303766.pdf?src-supplier=Avnet, ComponentLink2URL=https://datasheet.ciiva.com/8303/ss19-8303766.pdf?src-supplier=Avnet, ComponentLink3Description=https://datasheet.ciiva.com/910/ss12-910695.pdf?src-supplier=Digi-Key, ComponentLink3URL=https://datasheet.ciiva.com/910/ss12-910695.pdf?src-supplier=Digi-Key, ComponentLink4Description=https://datasheet.ciiva.com/7965/1766303-7965241.pdf?src-supplier=Element14, ComponentLink4URL=https://datasheet.ciiva.com/7965/1766303-7965241.pdf?src-supplier=Element14, ComponentLink5Description=https://datasheet.ciiva.com/910/ss12-910696.pdf?src-supplier=Digi-Key, ComponentLink5URL=https://datasheet.ciiva.com/910/ss12-910696.pdf?src-supplier=Digi-Key, ComponentLink6Description=https://datasheet.ciiva.com/25951/ss19-25951496.pdf?src-supplier=Avnet+Europe, ComponentLink6URL=https://datasheet.ciiva.com/25951/ss19-25951496.pdf?src-supplier=Avnet+Europe, ComponentLink7Description=https://datasheet.ciiva.com/910/ss12-910697.pdf?src-supplier=Digi-Key, ComponentLink7URL=https://datasheet.ciiva.com/910/ss12-910697.pdf?src-supplier=Digi-Key, ComponentLink8Description=https://datasheet.ciiva.com/22651/1880990-22651980.pdf?src-supplier=Element14, ComponentLink8URL=https://datasheet.ciiva.com/22651/1880990-22651980.pdf?src-supplier=Element14, Current=1A, Current Rating=1A, Design Item ID=SS14, Element Configuration=Single, Forward Current=1A, Height=2.2mm, Lead Free="Lead Free", Length=4.75mm, Manufacturer Part Number=SS14, Max Reverse Voltage (DC)=40V, Mount="Surface Mount", Number of Elements=1, Number of Pins=2, Number of Terminals=2, Output Current=1A, Packaging="Tape and Reel", Peak Non-Repetitive Surge Current=40A, Polarity=Standard, Power Dissipation=1.1W, Pricing 1="1 = 0,42000, 10 = 0,29400, 50 = 0,29400, 100 = 0,13500, 1000 = 0,10400, 10000 = 0,08100 (USD)", Radiation Hardening=No, REACH SVHC="No SVHC", RoHS=Yes, Source=main.SchLib, Stock 1=302709, Termination=SMD/SMT, Voltage=40V, Voltage Rating (DC)=40V, Weight=0.003739oz, Width=2.95mm
D5: library part CMP-029-0001-5, "3pin led red/blue", Manufacturer=OptoSupply, Manufacturer Part Number=OSRBMC3131A, Darkglass part=D00-0004, Design Item ID=3pled, Pricing 1="1=0,51300, 5=0,40600, 25=0,24500, 100=0,22500, 500=0,21300 (USD)", RoHS=No, Selective Soldering=YES, Source=main.SchLib, Stock 1=650, Supplied by Darkglass=YES
D6 D7 D8 D9 D11 D12: library part CMP-029-0008-5, "Fast Switching Diode, 75 V, 0.3 A, -65 to 150 degC, 2-Pin SOD323, RoHS, Tape and Reel", Average Rectified Current=150mA, Capacitance=2pF, Current=2A, Forward Current=300mA, Forward Voltage=1.25V, Manufacturer=Pericom, Max Operating Temperature=150°C, Max Repetitive Reverse Voltage (Vrrm)=75V, Min Operating Temperature=-65°C, Package Quantity=3000, Peak Reverse Current=1uA, Power Dissipation=200mW, Available Preview Images=2D, ComponentLink1Description="Manufacturer URL", ComponentLink1URL=http://www.diodes.com/, ComponentLink2Description=Datasheet, ComponentLink2URL=http://www.diodes.com/datasheets/ds30097.pdf, ComponentLink3Description=https://datasheet.ciiva.com/16199/ds30097-16199061.pdf?src-supplier=Future+Electronics, ComponentLink3URL=https://datasheet.ciiva.com/16199/ds30097-16199061.pdf?src-supplier=Future+Electronics, ComponentLink4Description=https://datasheet.ciiva.com/16472/ds30097-16472599.pdf?src-supplier=Avnet+Asia, ComponentLink4URL=https://datasheet.ciiva.com/16472/ds30097-16472599.pdf?src-supplier=Avnet+Asia, ComponentLink5Description=https://datasheet.ciiva.com/1179/ds30097-1179355.pdf?src-supplier=Element14, ComponentLink5URL=https://datasheet.ciiva.com/1179/ds30097-1179355.pdf?src-supplier=Element14, ComponentLink6Description=https://datasheet.ciiva.com/8300/ds30097-8300396.pdf?src-supplier=Avnet, ComponentLink6URL=https://datasheet.ciiva.com/8300/ds30097-8300396.pdf?src-supplier=Avnet, ComponentLink7Description=https://datasheet.ciiva.com/911/ds30097-911741.pdf?src-supplier=Digi-Key, ComponentLink7URL=https://datasheet.ciiva.com/911/ds30097-911741.pdf?src-supplier=Digi-Key, ComponentLink8Description=https://datasheet.ciiva.com/911/ds30097-911742.pdf?src-supplier=Digi-Key, ComponentLink8URL=https://datasheet.ciiva.com/911/ds30097-911742.pdf?src-supplier=Digi-Key, ComponentLink9Description=https://datasheet.ciiva.com/25946/ds30097-25946926.pdf?src-supplier=Avnet+Europe, ComponentLink9URL=https://datasheet.ciiva.com/25946/ds30097-25946926.pdf?src-supplier=Avnet+Europe, ComponentLink10Description=https://datasheet.ciiva.com/911/ds30097-911743.pdf?src-supplier=Digi-Key, ComponentLink10URL=https://datasheet.ciiva.com/911/ds30097-911743.pdf?src-supplier=Digi-Key, ComponentLink11Description=http://datasheet.octopart.com/1N4148WS-7-F-Diodes-Inc.-datasheet-11839050.pdf?src-supplier=Newark, ComponentLink11URL=http://datasheet.octopart.com/1N4148WS-7-F-Diodes-Inc.-datasheet-11839050.pdf?src-supplier=Newark, ComponentLink12Description=http://datasheet.octopart.com/1N4148WS-7-F-Diodes-Inc.-datasheet-8329243.pdf?src-supplier=Newark, ComponentLink12URL=http://datasheet.octopart.com/1N4148WS-7-F-Diodes-Inc.-datasheet-8329243.pdf?src-supplier=Newark, ComponentLink13Description=http://datasheet.octopart.com/1N4148WS-7-F-Diodes-Inc.-datasheet-10031541.pdf?src-supplier=Newark, ComponentLink13URL=http://datasheet.octopart.com/1N4148WS-7-F-Diodes-Inc.-datasheet-10031541.pdf?src-supplier=Newark, ComponentLink14Description=http://datasheet.octopart.com/1N4148WS-7-F-Diodes-Inc.-datasheet-34441419.pdf?src-supplier=Allied+Electronics, ComponentLink14URL=http://datasheet.octopart.com/1N4148WS-7-F-Diodes-Inc.-datasheet-34441419.pdf?src-supplier=Allied+Electronics, ComponentLink15Description=http://datasheet.octopart.com/1N4148WS-7-F-Diodes-Inc.-datasheet-62305040.pdf?src-supplier=Element14, ComponentLink15URL=http://datasheet.octopart.com/1N4148WS-7-F-Diodes-Inc.-datasheet-62305040.pdf?src-supplier=Element14, ComponentLink16Description=http://datasheet.octopart.com/1N4148WS-7-F-Diodes-Inc.-datasheet-479.pdf?src-supplier=Mouser, ComponentLink16URL=http://datasheet.octopart.com/1N4148WS-7-F-Diodes-Inc.-datasheet-479.pdf?src-supplier=Mouser, ComponentLink17Description=http://datasheet.octopart.com/1N4148WS-7-F-Diodes-Inc.-datasheet-139480.pdf?src-supplier=Digi-Key, ComponentLink17URL=http://datasheet.octopart.com/1N4148WS-7-F-Diodes-Inc.-datasheet-139480.pdf?src-supplier=Digi-Key, ComponentLink18Description=http://datasheet.octopart.com/1N4148WS-7-F-Diodes-Inc.-datasheet-7284054.pdf?src-supplier=Jameco, ComponentLink18URL=http://datasheet.octopart.com/1N4148WS-7-F-Diodes-Inc.-datasheet-7284054.pdf?src-supplier=Jameco, ComponentLink19Description=http://datasheet.octopart.com/1N4148WS-7-F-Diodes-Inc.-datasheet-14053694.pdf?src-supplier=IIIC, ComponentLink19URL=http://datasheet.octopart.com/1N4148WS-7-F-Diodes-Inc.-datasheet-14053694.pdf?src-supplier=IIIC, ComponentLink20Description=http://datasheet.octopart.com/1N4148WS-7-F-Multicomp-datasheet-21397732.pdf?src-supplier=Newark, ComponentLink20URL=http://datasheet.octopart.com/1N4148WS-7-F-Multicomp-datasheet-21397732.pdf?src-supplier=Newark, ComponentLink21Description=http://datasheet.octopart.com/1N4148WS-7-F-Pericom-datasheet-62305040.pdf?src-supplier=Newark, ComponentLink21URL=http://datasheet.octopart.com/1N4148WS-7-F-Pericom-datasheet-62305040.pdf?src-supplier=Newark, Contact Plating=Tin, Current Rating=150mA, DatasheetVersion="Rev. 25-2, 03/2016", Design Item ID=1N4148WS-7-F, Element Configuration=Single, Height=1mm, Lead Free="Lead Free", Length=1.8mm, Manufacturer Part Number=1N4148WS-7-F, Max Forward Surge Current (Ifsm)=2A, Max Reverse Voltage (DC)=75V, Max Surge Current=2A, Mount="Surface Mount", Number of Pins=2, Output Current=150mA, PackageDescription="2-Pin Small Outline Diode, Body 1.7 x 1.3 mm", PackageReference=SOD323-2, Packaging="Tape and Reel", Peak Non-Repetitive Surge Current=2A, Polarity=Standard, Power Rating=200mW, Pricing 1="1 = 0.19000, 10 = 0.17100, 100 = 0.09320, 500 = 0.05736, 1000 = 0.03911 (USD)", Radiation Hardening=No, REACH SVHC="No SVHC", Recovery Time=4ns, Reverse Recovery Time=4ns, Source=main.SchLib, Stock 1=107341, Voltage=75V, Voltage Rating (DC)=75V, Weight=0.000173oz, Width=1.4mm
D13: library part CMP-055-0001-A.2, "Rectifier Diode, Schottky, 2 Element, 0.2A, 30V V(RRM), Silicon", Average Rectified Current=200mA, Case/Package=SOT-323, Forward Voltage=800mV, Max Forward Surge Current (Ifsm)=600mA, Max Operating Temperature=125°C, Max Repetitive Reverse Voltage (Vrrm)=30V, Max Reverse Leakage Current=2uA, Min Operating Temperature=-65°C, Package Quantity=1, Power Dissipation=200mW, Contact Plating=Tin,Matte, Element Configuration=Dual, Forward Current=200mA, Height=0.9mm, Lead Free="Lead Free", Length=2.2mm, Max Reverse Voltage (DC)=30V, Max Surge Current=600mA, Mount="Surface Mount", Number of Pins=3, Packaging="Tape and Reel", Peak Non-Repetitive Surge Current=600mA, Peak Reverse Current=2uA, Radiation Hardening=No, REACH SVHC="No SVHC", Recovery Time=5ns, Reverse Recovery Time=5ns, Weight=0.03g, Width=1.35mm
J1: library part CMP-034-0002-1, "Low Voltage Power Supply Connector", ComponentLink1Description="Manufacturer Link", ComponentLink1URL=http://domino.kycon.com/internet/Products.html, Darkglass part=D00-0019, Design Item ID="DC Jack TH", Selective Soldering=Yes, Source=main.SchLib, Supplied by Darkglass=Yes
J2 J3: library part CMP-028-0129-3, Darkglass part=D00-0011, Design Item ID="Neutrik TRS Jack with metal nut", Selective Soldering=Yes, Source=main.SchLib, Supplied by Darkglass=Yes
L1 L2: library part CMP-027-0006-1, "General Purpose Inductor, 10uH, 10%, 1 Element, Ferrite-Core, SMD, 1514", Case/Size Code=1514, DC Resistance (DCR)=230mR, Inductance-Nom (L)=10uH, Inductor Application="POWER INDUCTOR", Inductor Type="GENERAL PURPOSE INDUCTOR", Max Operating Temperature=100°C, Min Operating Temperature=-40°C, Package Height=2.7mm, Package Length=3.8mm, Package Style=SMTMeter, Package Width=3.5mm, Rated Current-Max=760mA, Test Frequency=100kHz, Tolerance=10%, Construction=Unshielded, Core Material=Ferrite, Number of Functions=1, Number of Pins=4, Packaging="Tape and Reel", REACH SVHC=Yes, RoHS Compliant=Yes, Series=CR32, Shape/Size Description="RECTANGULAR PACKAGE", Shielding=Unshielded, Surface Mount=Yes, Terminal Placement="Dual Ended", Termination=Wraparound
L3: library part CMP-027-0002-5, "Ferrite Beads Multi-Layer High Current 1KOhm 25% 100MHz 1.6A 0.12Ohm DCR", Manufacturer=Murata, Manufacturer Part Number=BLM21SP102SN1D, Design Item ID="Ferrite BLM21SP102SN1", Pricing 1="1=0,29000, 10=0,17400, 100=0,12300, 500=0,10600, 1000=0,09400, 4000=0,08000 (USD)", RoHS=No, Source=jimi.SchLib, Stock 1=10289
L4: library part CMP-00005-3, "FERRITE BEAD, AUDIO, 500 OHM 0402 Low THD+N", Case Code (Imperial)=0402, Case Code (Metric)=1005, DC Resistance (DCR)=1.65R, Max Current Rating=270mA, Max Operating Temperature=125°C, Min Operating Temperature=-55°C, Case/Package=0402, Height=0.022inch, Length=0.039inch, Mount="Surface Mount", Number of Lines=1, Packaging="Tape and Reel", Width=0.02inch
LED1: library part CMP-036-0000-1, "THT LED round mono-color waterclear, WL-TMRW , RED", Emitting color=RED, Manufacturer="Wuerth Elektronik", PartNumber=151034rs03000, Available Preview Images=2D, ComponentLink1Description="Manufacturer URL", ComponentLink1URL=http://www.we-online.com, ComponentLink2Description=Datasheet, ComponentLink2URL=http://katalog.we-online.de/pbs/datasheet/7448042001.pdfhttp://katalog.we-online.de/pbs/datasheet/7448042001.pdfhttp://katalog.we-online.de/pbs/datasheet/7448042001.pdfhttp://katalog.we-online.de/pbs/datasheet/151033BS03000.pdf, Darkglass=D00-0042, Darkglass part=D00-0042, Design Item ID="LED 3mm RED", Fitted=Fitted, Mouser part=710-151034RS03000, PackageReference="Type 3mm", Selective Soldering=YES, Source=main.SchLib, Supplied by Darkglass=YES
OC1: "Optoisolator Photocell Optocoupler 1 Channel", Package="- Advanced Photonix", Availability=Unavailable, MF="Advanced Photonix", MP=NSL-32SR2S, Price=None, SnapEDA_Link=https://www.snapeda.com/parts/NSL-32SR2S/Advanced%20Photonix/view-part/2598365/?ref=snap
Q1 Q2 Q3 Q4: library part CMP-028-0021-7, "JFET N-CH 40V 350MW SOT23", Breakdown Voltage=-40V, Case/Package=SOT-23, Continuous Drain Current (ID)=1mA, Current Rating=50mA, Drain to Source Voltage (Vdss)=40V, Manufacturer="ON Semiconductor / Fairchild", Max Operating Temperature=150°C, Max Power Dissipation=350mW, Min Operating Temperature=-55°C, Package Quantity=1, ComponentLink1Description=https://datasheet.ciiva.com/960/mmbfj201-960915.pdf?src-supplier=Digi-Key, ComponentLink1URL=https://datasheet.ciiva.com/960/mmbfj201-960915.pdf?src-supplier=Digi-Key, ComponentLink2Description=https://datasheet.ciiva.com/1188/j201-1188339.pdf?src-supplier=Element14, ComponentLink2URL=https://datasheet.ciiva.com/1188/j201-1188339.pdf?src-supplier=Element14, ComponentLink3Description=https://datasheet.ciiva.com/960/mmbfj201-960916.pdf?src-supplier=Digi-Key, ComponentLink3URL=https://datasheet.ciiva.com/960/mmbfj201-960916.pdf?src-supplier=Digi-Key, ComponentLink4Description=https://datasheet.ciiva.com/1209/mmbfj201-1209636.pdf?src-supplier=Farnell, ComponentLink4URL=https://datasheet.ciiva.com/1209/mmbfj201-1209636.pdf?src-supplier=Farnell, ComponentLink5Description=https://datasheet.ciiva.com/960/mmbfj201-960917.pdf?src-supplier=Digi-Key, ComponentLink5URL=https://datasheet.ciiva.com/960/mmbfj201-960917.pdf?src-supplier=Digi-Key, ComponentLink6Description=https://datasheet.ciiva.com/8084/mmbfj201-8084197.pdf?src-supplier=Avnet, ComponentLink6URL=https://datasheet.ciiva.com/8084/mmbfj201-8084197.pdf?src-supplier=Avnet, ComponentLink7Description=https://datasheet.ciiva.com/8084/mmbfj201-8084198.pdf?src-supplier=Avnet, ComponentLink7URL=https://datasheet.ciiva.com/8084/mmbfj201-8084198.pdf?src-supplier=Avnet, ComponentLink8Description=https://datasheet.ciiva.com/4437/mmbfj201-196106-4437754.pdf?src-supplier=Mouser, ComponentLink8URL=https://datasheet.ciiva.com/4437/mmbfj201-196106-4437754.pdf?src-supplier=Mouser, ComponentLink9Description=https://datasheet.ciiva.com/15224/getdatasheetpartid-92710-15224267.pdf?src-supplier=Verical, ComponentLink9URL=https://datasheet.ciiva.com/15224/getdatasheetpartid-92710-15224267.pdf?src-supplier=Verical, ComponentLink10Description=https://datasheet.ciiva.com/26026/mmbfj201-26026604.pdf?src-supplier=Avnet+Europe, ComponentLink10URL=https://datasheet.ciiva.com/26026/mmbfj201-26026604.pdf?src-supplier=Avnet+Europe, ComponentLink11Description=https://datasheet.ciiva.com/16775/mmbfj201-16775887.pdf?src-supplier=Future+Electronics, ComponentLink11URL=https://datasheet.ciiva.com/16775/mmbfj201-16775887.pdf?src-supplier=Future+Electronics, Design Item ID=MMBFJ201, Element Configuration=Single, Gate to Source Voltage (Vgs)=-40V, Height=0.93mm, Lead Free="Lead Free", Length=2.92mm, Manufacturer Part Number=MMBFJ201, Mount="Surface Mount", Mouser part=512-MMBFJ201, Number of Pins=3, Packaging="Tape and Reel", Power Dissipation=350mW, Pricing 1="1 = 0,45000, 10 = 0,35500, 100 = 0,24350, 500 = 0,16696, 1000 = 0,12522 (USD)", Radiation Hardening=No, REACH SVHC="No SVHC", RoHS=Yes, Source=main.SchLib, Stock 1=0, Voltage Rating (DC)=40V, Weight=0.03g, Width=1.3mm
R1 R2 R34 R40 R53 R54: library part CMP-03341-2, "Resistor 20k +-1% 0603 Thin film 0.1W +-50ppm/°C", Maximum working voltage=75V, Power=100mW, Resistance=20k, Temperature Coefficient (ppm/°C)=50, Tolerance (+-)=1%, Composition="Thin film", Size (Imperial)=0603
R3 R5 R6 R7 R8 R9 R10 R12 R14 R16 R19 R20 R21 R32 R33 R37 R39 R42 R43 R44 R50 R52 R55: library part CMP-06207-1, "Resistor 10k +-1% 0603 Thick film 0.1W +- 100ppm/°C", Maximum working voltage=75V, Power=100mW, Resistance=10k, Temperature Coefficient (ppm/°C)=100, Tolerance (+-)=1%, Composition="Thick film", Size (Imperial)=0603
R4 R18: library part CMP-04716-2, "Resistor 10R +-5% 0805 Thick film 0.125W +-200ppm/°C", Maximum working voltage=150V, Power=125mW, Resistance=10, Temperature Coefficient (ppm/°C)=200, Tolerance (+-)=5%, Composition="Thick film", Size (Imperial)=0805
R11 R48 R61: library part CMP-03268-2, "Resistor 4.7k +-1% 0603 Thin film 0.1W +-50ppm/°C", Maximum working voltage=75V, Power=100mW, Resistance=4.7k, Temperature Coefficient (ppm/°C)=50, Tolerance (+-)=1%, Composition="Thin film", Size (Imperial)=0603
R13 R15 R22 R25 R45 R56 R57 R58: library part CMP-03428-2, "Resistor 100k +-1% 0603 Thin film 0.1W +-50ppm/°C", Maximum working voltage=75V, Power=100mW, Resistance=100k, Temperature Coefficient (ppm/°C)=50, Tolerance (+-)=1%, Composition="Thin film", Size (Imperial)=0603
R17: library part CMP-07060-1, "Resistor 29.4k +-1% 0805 Thick film 0.125W +- 100ppm/°C", Maximum working voltage=150V, Power=125mW, Resistance=29.4k, Temperature Coefficient (ppm/°C)=100, Tolerance (+-)=1%, Composition="Thick film", Size (Imperial)=0805
R23 R47: library part CMP-02362-2, "Resistor 100R +-1% 0805 Thin film 0.125W +-50ppm/°C", Maximum working voltage=150V, Power=125mW, Resistance=100, Temperature Coefficient (ppm/°C)=50, Tolerance (+-)=1%, Composition="Thin film", Size (Imperial)=0805
R24 R26 R27 R28 R30 R38 R46 R60: library part CMP-03540-2, "Resistor 1M +-1% 0603 Thin film 0.1W +-50ppm/°C", Maximum working voltage=75V, Power=100mW, Resistance=1M, Temperature Coefficient (ppm/°C)=50, Tolerance (+-)=1%, Composition="Thin film", Size (Imperial)=0603
R29 R36 R51: library part CMP-03288-2, "Resistor 6.81k +-1% 0603 Thin film 0.1W +-50ppm/°C", Maximum working voltage=75V, Power=100mW, Resistance=6.81k, Temperature Coefficient (ppm/°C)=50, Tolerance (+-)=1%, Composition="Thin film", Size (Imperial)=0603
R31 R59: library part CMP-03227-2, "Resistor 2.2k +-1% 0603 Thin film 0.1W +-50ppm/°C", Maximum working voltage=75V, Power=100mW, Resistance=2.2k, Temperature Coefficient (ppm/°C)=50, Tolerance (+-)=1%, Composition="Thin film", Size (Imperial)=0603
R35: library part CMP-02391-1, "Resistor 200R +-1% 0805 Thin film 0.125W +-50ppm/°C", Maximum working voltage=150V, Power=125mW, Resistance=200, Temperature Coefficient (ppm/°C)=50, Tolerance (+-)=1%, Composition="Thin film", Size (Imperial)=0805
R41: library part CMP-03249-2, "Resistor 3.3k +-1% 0603 Thin film 0.1W +-50ppm/°C", Maximum working voltage=75V, Power=100mW, Resistance=3.3k, Temperature Coefficient (ppm/°C)=50, Tolerance (+-)=1%, Composition="Thin film", Size (Imperial)=0603
R49: library part CMP-03387-2, "Resistor 47k +-1% 0603 Thin film 0.1W +-50ppm/°C", Maximum working voltage=75V, Power=100mW, Resistance=47k, Temperature Coefficient (ppm/°C)=50, Tolerance (+-)=1%, Composition="Thin film", Size (Imperial)=0603
S1: library part CMP-028-0082-7, "Tactile Switches 12x12x4.3mm 130gf", Color=Black, Contact Current Rating=5mA, Contact Resistance=100mR, Current Rating=50mA, Manufacturer=ALPS, Manufacturer Part Number=SKHCBFA010, Max Operating Temperature=85°C, Max Voltage Rating (DC)=12V, Min Operating Temperature=-30°C, Operating Force=1.27N, Package Quantity=3000, Actuator Length=0.8mm, ComponentLink1Description=https://datasheet.ciiva.com/26906/getdatasheetpartid-652335-26906164.pdf?src-supplier=Verical, ComponentLink1URL=https://datasheet.ciiva.com/26906/getdatasheetpartid-652335-26906164.pdf?src-supplier=Verical, ComponentLink2Description=https://datasheet.ciiva.com/14142/skhc-eng-datasheet-14142492.pdf?src-supplier=Distrelec, ComponentLink2URL=https://datasheet.ciiva.com/14142/skhc-eng-datasheet-14142492.pdf?src-supplier=Distrelec, ComponentLink3Description=https://datasheet.ciiva.com/16156/skhc-16156011.pdf?src-supplier=Onlinecomponents.com, ComponentLink3URL=https://datasheet.ciiva.com/16156/skhc-16156011.pdf?src-supplier=Onlinecomponents.com, ComponentLink4Description=http://datasheet.octopart.com/SKHCBFA010-ALPS-datasheet-37145171.pdf?src-supplier=Master+Electronics, ComponentLink4URL=http://datasheet.octopart.com/SKHCBFA010-ALPS-datasheet-37145171.pdf?src-supplier=Master+Electronics, Contact Plating=Silver, Darkglass part=D00-0022, Depth=12.5mm, Design Item ID="Tact footswitch", Electrical Life=1000000Cycles, Lead Free="Lead Free", Length=12mm, Max Current Rating=50mA, Mount="Through Hole", Orientation=Straight, Packaging=Bulk, Pricing 1="1 = 0,83000, 10 = 0,83000, 50 = 0,69900, 100 = 0,62000, 1000 = 0,45500, 10000 = 0,42900 (USD)", Radiation Hardening=No, Selective Soldering=Yes, Source=main.SchLib, Stock 1=14972, Supplied by Darkglass=Yes, Termination="PC Pins", Throw Configuration=SPST, Voltage Rating (DC)=12V